# EAGLE board Layout_PCB (EAGLE 9.7.0)
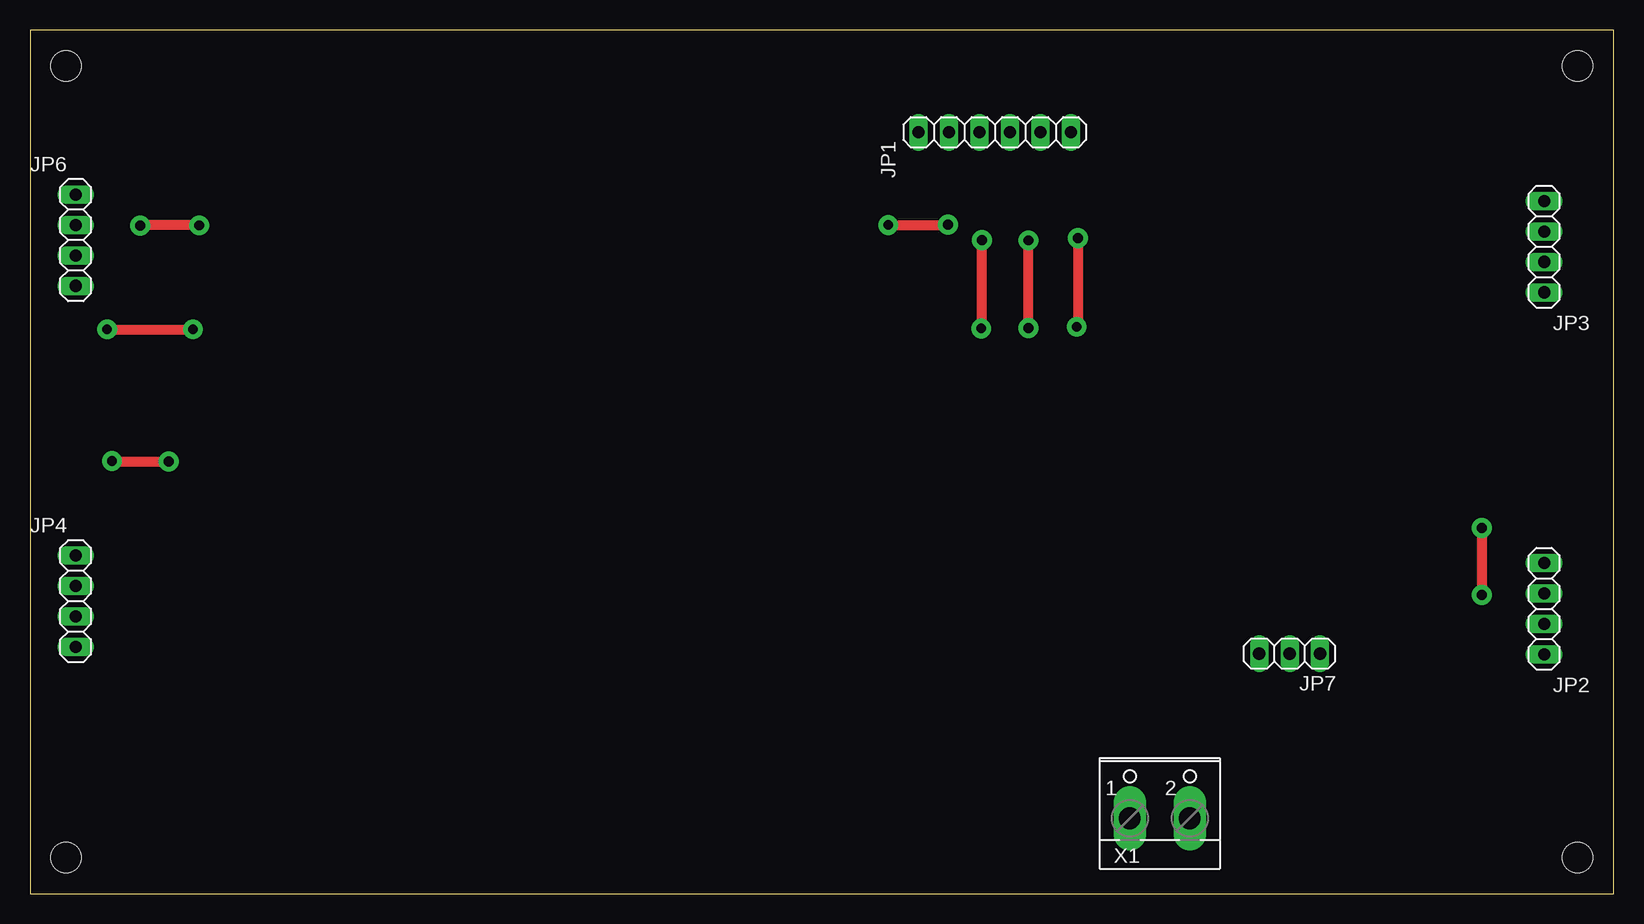
[diagram p0: board, top side]
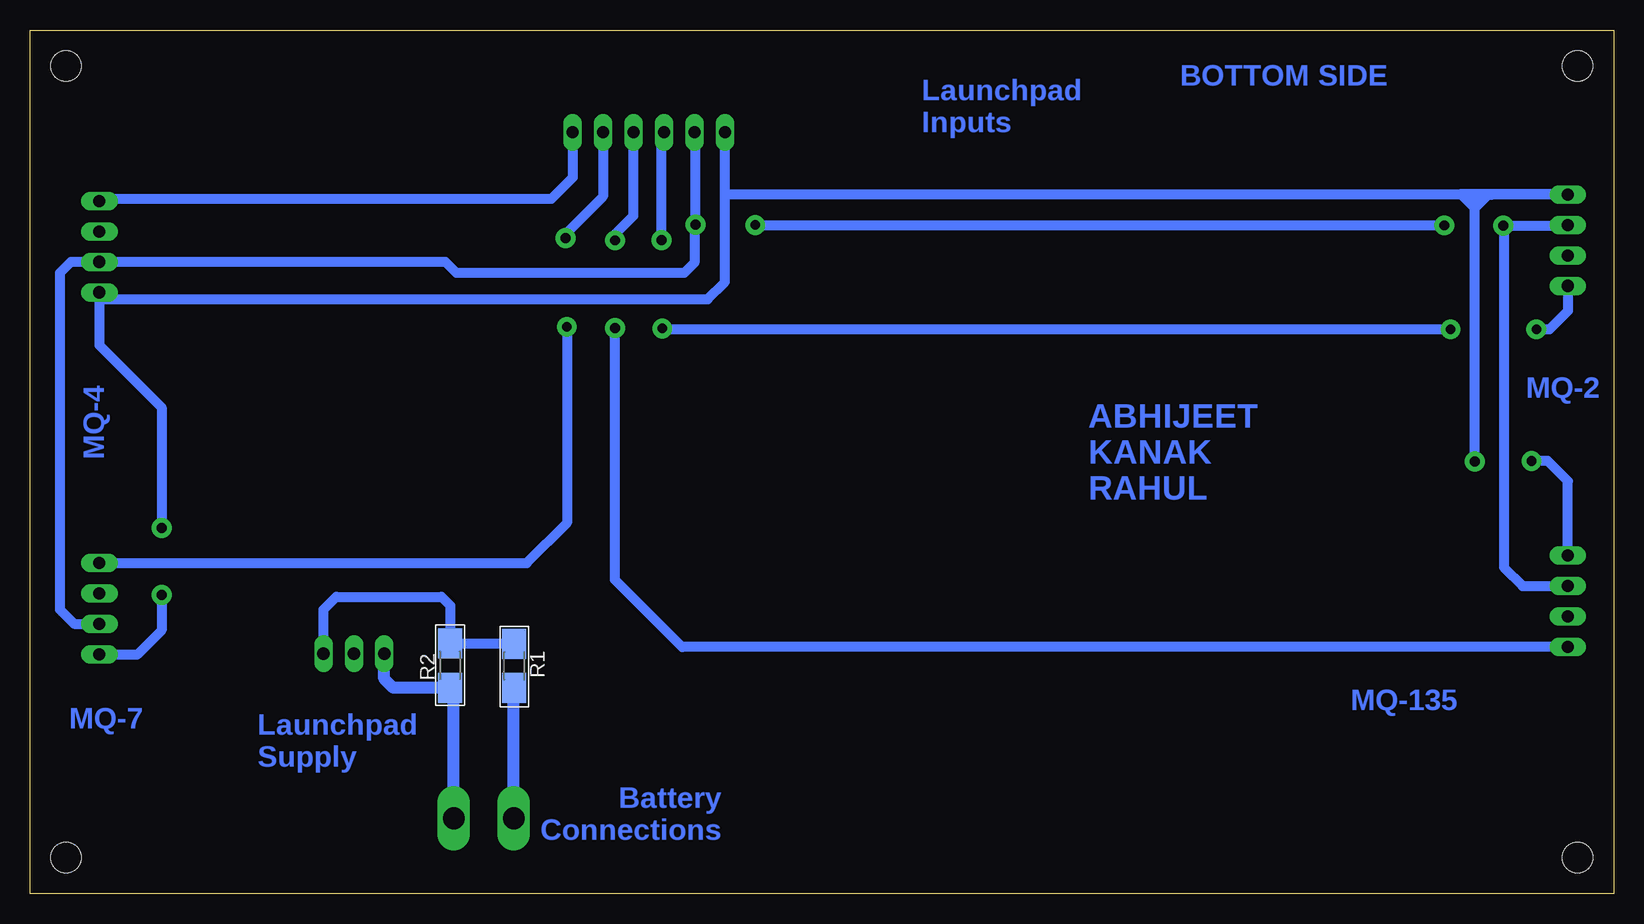
[diagram p1: board, bottom side, seen from below]

Size 132 x 72 mm. Coordinates in mm from the lower left corner, seen from the top.
Outline: 0,0 132,0 132,72 0,72 0,0
Copper layers (1*16): Top / Bottom
Stack-up Default Layer Stack: Top User Defined 0.035mm / Dielectric-1 User Defined 1.5mm / Bottom User Defined 0.035mm
Design rules "default": minimum track width 6mil, minimum drill 0.35mm, track to track 6mil, track to pad 6mil, pad to pad 6mil, via to via 6mil, smd to smd 6mil, copper to edge 40mil, drill to drill 6mil, minimum pad ring 10mil, minimum via ring 8mil, stop-mask expansion 4mil, vias tented up to drill 0mil, thermal gap 10mil
Holes 2.5 mm at 129,69 3,69 129,3 3,3

## Footprints (pad centres in the part's own frame; a part is rotated, then mirrored left to right if it is on the bottom)
1X06 = drill 1.016 long: 1 -6.35,0; 2 -3.81,0; 3 -1.27,0; 4 1.27,0; 5 3.81,0; 6 6.35,0
1X04 = drill 1.016 long: 1 -3.81,0; 2 -1.27,0; 3 1.27,0; 4 3.81,0
1X03 = drill 1.016 long: 1 -2.54,0; 2 0,0; 3 2.54,0
M1206 = smd 2.5 x 2: 1 -1.85,0; 2 1.85,0
W237-102 = drill 1.8 long: 1 -2.5,-1.27; 2 2.5,-1.27

## Placement (x,y rotation side)
JP1  PINHD-1X6  [1X06]  80.42,63.47 0 top
JP2  PINHD-1X4  [1X04]  126.22,23.75 90 top
JP3  PINHD-1X4  [1X04]  126.22,53.93 90 top
JP4  PINHD-1X4  [1X04]  3.81,24.37 270 top
JP6  PINHD-1X4  [1X04]  3.81,54.47 270 top
JP7  PINHD-1X3  [1X03]  105,20 180 top
R1  1.2k  [M1206]  91.63,18.98 270 bottom
R2  10k  [M1206]  96.98,19.01 90 bottom
X1  [W237-102]  94.18,7.54 0 top

## Library data of the parts
JP1-JP4 JP6 JP7 = Connector; CATEGORY: CONNECTOR; SUB-CATEGORY: PIN-HEADER
R1 R2 = BASIC_Components
X1 = BASIC_Components; MPN: 237-102; OC_FARNELL: unknown; OC_NEWARK: 70K9898

## Nets
3V3: JP7.1 R1.1 R2.2
3V7: R1.2 X1.1
GND: JP1.2 JP2.2 JP3.2 JP4.2 JP6.2
GND_SUPPLY: JP7.3 R2.1 X1.2
MQ-2_AO: JP1.3 JP6.4
MQ-2_DO: JP6.3
MQ-4_AO: JP1.6 JP3.4
MQ-4_DO: JP3.3
MQ-7_AO: JP1.5 JP2.4
MQ-7_DO: JP2.3
MQ-135_AO: JP1.4 JP4.4
MQ-135_DO: JP4.3
VCC: JP1.1 JP2.1 JP3.1 JP4.1 JP6.1

## Tracks (layer width: path | path; a pad name or v marks a point on that pad's centre or on a via)
3V3
  Bottom 0.813: R1.1 96.96,20.83 | 96.96,20.83 R2.2 | JP7.1 107.54,23.68 106.48,24.74 97.69,24.74 96.96,24.01 96.96,20.83
3V7
  Bottom 1.016: X1.1 91.67,17.08 R1.2
GND  (via drill 0.81 pad 1.65)
  Top 0.813: v9.18,55.69 9.21,55.72 v14.11,55.72 14.12,55.7 | v71.54,55.74 76.49,55.74 v76.53,55.78
  Bottom 0.813: v9.18,55.69 9.13,55.64 9.13,27.19 7.58,25.64 JP4.2 | 9.2,55.68 v9.18,55.69 | v14.11,55.72 71.51,55.72 v71.54,55.74 71.55,55.73 | JP1.2 76.53,63.39 v76.53,55.78 76.61,55.7 76.61,52.6 77.47,51.74 96.44,51.74 97.36,52.66 JP3.2 128.59,52.66 129.51,51.74 129.51,23.67 128.32,22.48 JP2.2 | v9.18,55.69 3.86,55.69 JP6.2
GND_SUPPLY
  Bottom 1.016: X1.2 96.67,16.85 R2.1 101.71,17.16 102.46,17.9 JP7.3
MQ-2_AO  (via drill 0.81 pad 1.65)
  Top 0.813: v6.43,47.04 v13.59,47.04 | v79.35,54.48 79.3,54.43 v79.3,47.12
  Bottom 0.813: JP6.4 3.81,48.56 5.33,47.04 v6.43,47.04 | v13.59,47.04 79.22,47.04 v79.3,47.12 | v79.35,54.48 79.35,63.27 JP1.3
MQ-4_AO
  Bottom 0.813: JP3.4 126.05,57.91 88.56,57.91 86.77,59.7 JP1.6
MQ-7_AO  (via drill 0.81 pad 1.65)
  Top 0.813: v87.35,54.63 87.35,47.35 v87.25,47.24
  Bottom 0.813: JP1.5 84.23,58.11 87.35,54.99 v87.35,54.63 | v87.25,47.24 87.25,30.91 90.6,27.56 JP2.4
MQ-135_AO  (via drill 0.81 pad 1.65)
  Top 0.813: v83.24,47.14 v83.24,54.46
  Bottom 0.813: JP4.4 77.63,20.56 83.24,26.16 v83.24,47.14 | v83.24,54.46 83.24,54.97 81.69,56.51 JP1.4
VCC  (via drill 0.81 pad 1.65)
  Top 0.813: 126.14,50.04 JP3.1 | v121.03,30.48 v121.03,24.89 | v6.83,36.07 6.88,36.02 v11.56,36.02
  Bottom 0.813: 11.56,57.16 11.56,58.28 10.43,58.28 | v11.56,36.02 11.56,57.15 | 73.83,58.33 74,58.33 74.07,58.4 | 73.83,58.33 12.72,58.33 | 12.72,58.33 3.86,58.33 JP6.1 10.06,58.28 10.43,58.28 | 73.83,58.33 | 74.07,58.4 74.07,51 75.51,49.56 125.66,49.56 JP3.1 126.22,45.73 121.03,40.54 v121.03,30.48 | 74.07,58.4 JP1.1 | v121.03,24.89 121.03,21.95 123.06,19.91 126.19,19.91 JP2.1 | JP4.1 3.81,34.39 5.49,36.07 v6.83,36.07 | 11.56,57.15 11.56,57.16 | 11.56,57.16 12.72,58.33 | 11.56,57.15 10.43,58.28

## Text on the board
Bottom: BOTTOM SIDE | Launchpad / Inputs | MQ-2 | MQ-4 | ABHIJEET / KANAK / RAHUL | MQ-135 | MQ-7 | Launchpad / Supply | Battery / Connections